# EAGLE board TakpadV3 (EAGLE 8.4.0)
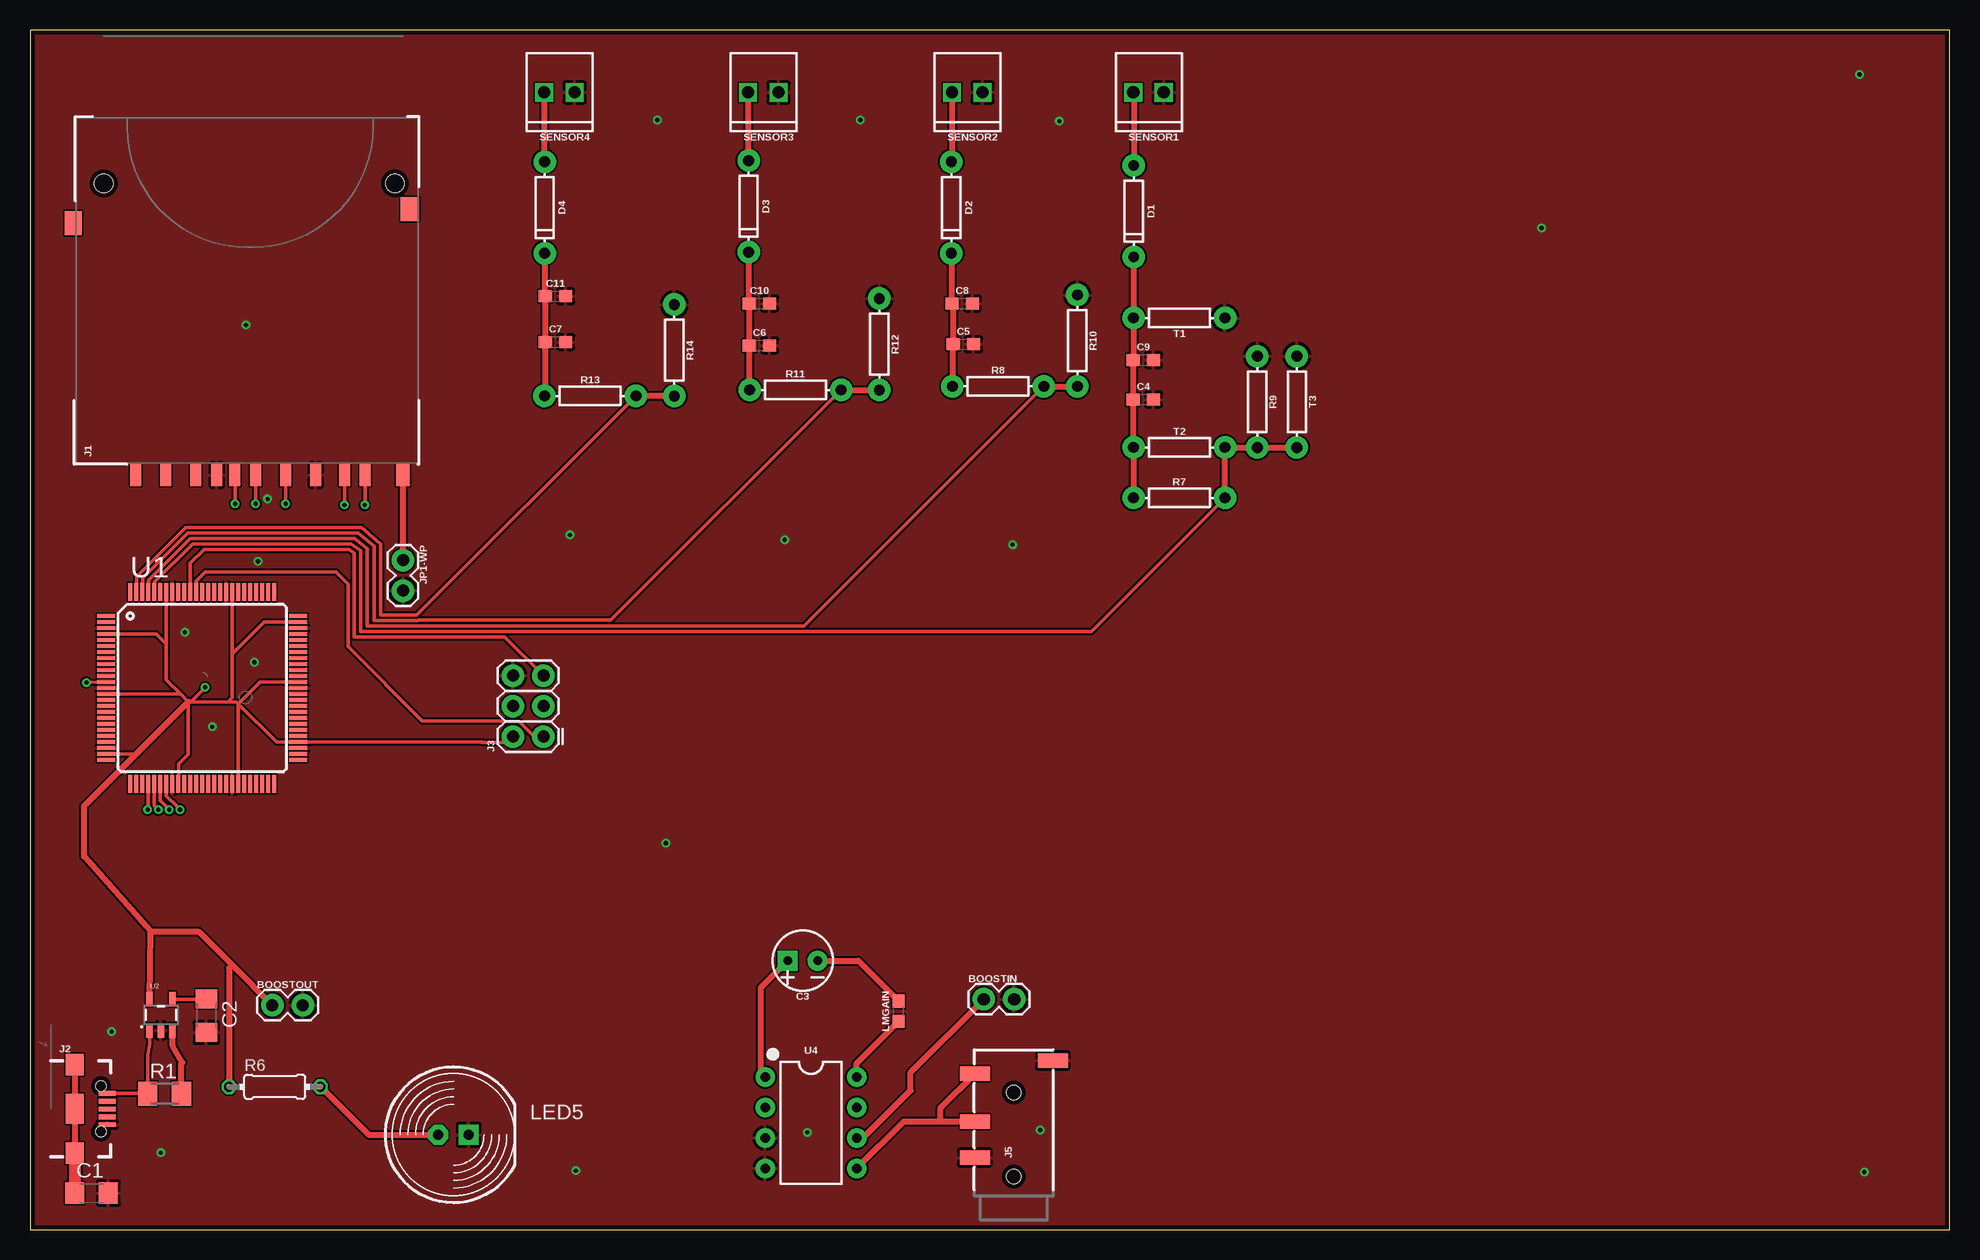
[diagram p0: board, top side]
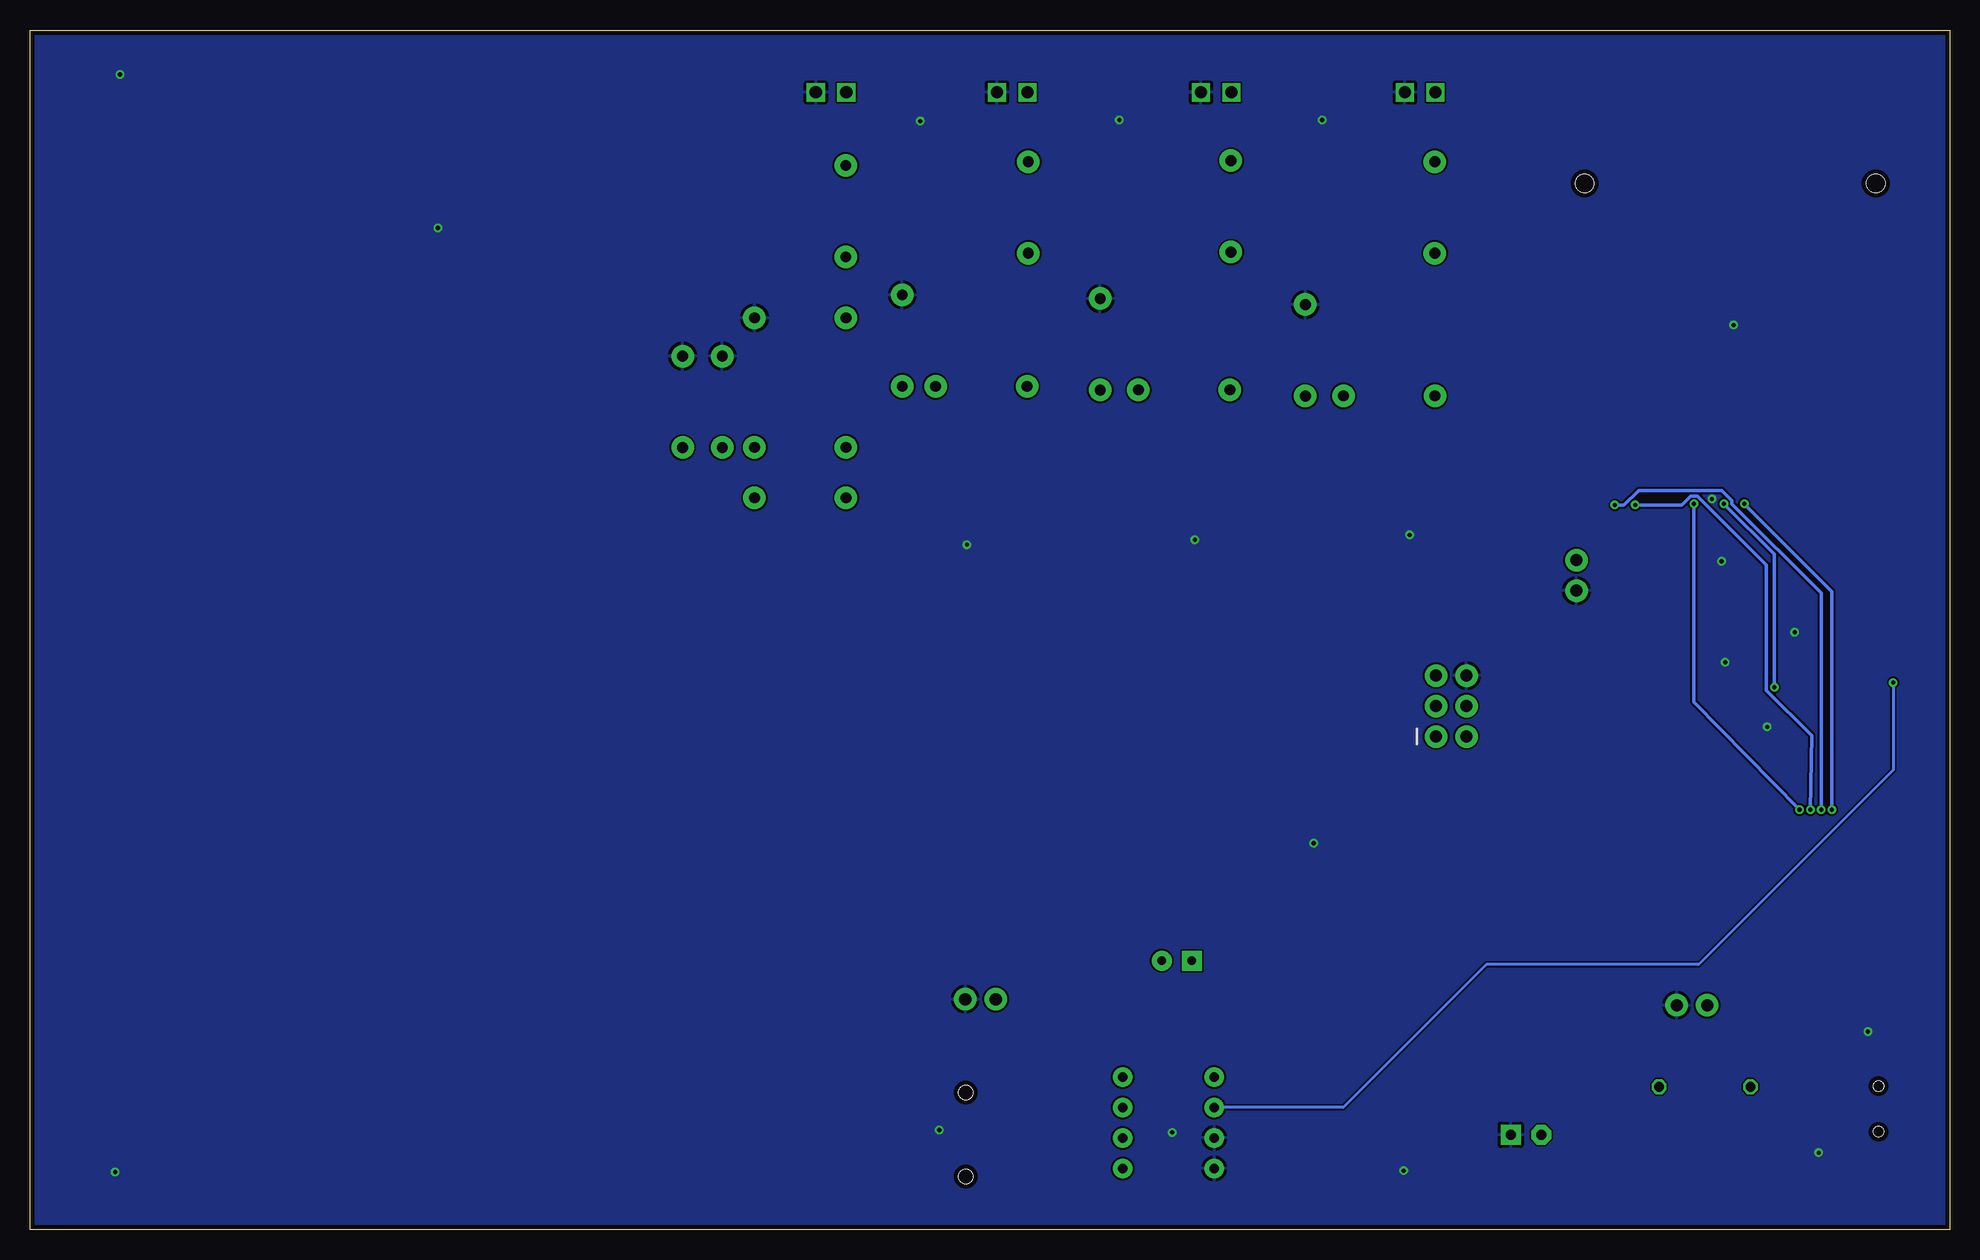
[diagram p1: board, bottom side, seen from below]

Size 160 x 100 mm. Coordinates in mm from the lower left corner, seen from the top.
Outline: 0,0 160,0 160,100 0,100 0,0
Copper layers (1*16): Top 0.0356mm / dielectric 1.5011mm / Bottom 0.0356mm
Design rules "osh-park-2-layers-design-rules": minimum track width 6mil, minimum drill 10mil, track to track 6mil, track to pad 6mil, pad to pad 6mil, via to via 6mil, smd to smd 6mil, copper to edge 15mil, drill to drill 6mil, minimum pad ring 7mil, minimum via ring 7mil, stop-mask expansion 3mil, vias tented up to drill 0mil, thermal gap 10mil

## Footprints (pad centres in the part's own frame; a part is rotated, then mirrored left to right if it is on the bottom)
1X02 = drill 1.016 pad 1.88: 1 0,0; 2 2.54,0
C1206 = smd 1.6 x 1.8: 1 -1.4,0; 2 1.4,0
CPOL-RADIAL-2.5MM-5MM-KIT = drill 0.7 pad 1.651 square: 1 1.25,0 | drill 0.7 pad 1.651: 2 -1.25,0
0603 = smd 1.1 x 1: 1 -0.85,0; 2 0.85,0
DIODE-1N4148 = drill 0.9 pad 1.88: A -3.81,0; C 3.81,0
SD = smd 1.8 x 0.9: 1 -1,6.77; 2 -1,4.27; 3 -1,2.52; 4 -1,-0.73; 5 -1,-3.23; 6 -1,-5.73; 7 -1,-8.15; 8 -1,-9.85; 9 -1,9.27; CD -1,1.02 | smd 2 x 1.4: SH@1 20,14.496 | smd 2 x 1.527: SH@2 21.15,-13.589 | smd 1.8 x 1.1: WP -1,-13 | hole 1.55: 23.3,11.94; 23.3,-12.32
USB-B-MICRO-SMD = smd 1.45 x 0.4: D+ 2.725,0; D- 2.725,0.65; GND 2.725,-1.3; ID 2.725,-0.65; VBUS 2.725,1.3 | smd 1.5 x 1.8: SHIELD1 0,3.685; SHIELD2 0,-3.685 | smd 1.5 x 2.5: SHIELD3 0,0 | hole 0.85: 2.2,1.9; 2.2,-1.9
2X3 = drill 1.016 pad 1.88: 1 0,0; 2 0,2.54; 3 2.54,0; 4 2.54,2.54; 5 5.08,0; 6 5.08,2.54
AUDIO_JACK_3.5MM_TRRS_SMD_RA = smd 1.2 x 2.5: EARTH 11.3,-3.25; RING1 6.2,3.25; RING2 3.2,3.25; TIP 10.2,3.25 | hole 1.2: 1.6,0; 8.6,0
LED10MM = drill 0.813 pad 1.676 octagon: A -1.27,0 | drill 0.813 pad 1.676 square: K 1.27,0
M1206 = smd 1.6 x 2: 1 -1.4,0; 2 1.4,0
0204/7 = drill 0.813 octagon: 1 -3.81,0; 2 3.81,0
AXIAL-0.3 = drill 0.9 pad 1.88: P$1 -3.81,0; P$2 3.81,0
1X02_2.54_SCREWTERM = drill 1.016 square: P1 2.54,0; P2 0,0
TQFP-100A-100 = smd 1.5 x 0.342: 1 -8,6; 2 -8,5.5; 3 -8,5; 4 -8,4.5; 5 -8,4; 6 -8,3.5; 7 -8,3; 8 -8,2.5; 9 -8,2; 10 -8,1.5; 11 -8,1; 12 -8,0.5; 13 -8,0; 14 -8,-0.5; 15 -8,-1; 16 -8,-1.5; 17 -8,-2; 18 -8,-2.5; 19 -8,-3; 20 -8,-3.5; 21 -8,-4; 22 -8,-4.5; 23 -8,-5; 24 -8,-5.5; 25 -8,-6; 51 8,-6; 52 8,-5.5; 53 8,-5; 54 8,-4.5; 55 8,-4; 56 8,-3.5; 57 8,-3; 58 8,-2.5; 59 8,-2; 60 8,-1.5; 61 8,-1; 62 8,-0.5; 63 8,0; 64 8,0.5; 65 8,1; 66 8,1.5; 67 8,2; 68 8,2.5; 69 8,3; 70 8,3.5; 71 8,4; 72 8,4.5; 73 8,5; 74 8,5.5; 75 8,6 | smd 0.342 x 1.5: 26 -6,-8; 27 -5.5,-8; 28 -5,-8; 29 -4.5,-8; 30 -4,-8; 31 -3.5,-8; 32 -3,-8; 33 -2.5,-8; 34 -2,-8; 35 -1.5,-8; 36 -1,-8; 37 -0.5,-8; 38 0,-8; 39 0.5,-8; 40 1,-8; 41 1.5,-8; 42 2,-8; 43 2.5,-8; 44 3,-8; 45 3.5,-8; 46 4,-8; 47 4.5,-8; 48 5,-8; 49 5.5,-8; 50 6,-8; 76 6,8; 77 5.5,8; 78 5,8; 79 4.5,8; 80 4,8; 81 3.5,8; 82 3,8; 83 2.5,8; 84 2,8; 85 1.5,8; 86 1,8; 87 0.5,8; 88 0,8; 89 -0.5,8; 90 -1,8; 91 -1.5,8; 92 -2,8; 93 -2.5,8; 94 -3,8; 95 -3.5,8; 96 -4,8; 97 -4.5,8; 98 -5,8; 99 -5.5,8; 100 -6,8
SOT23-5 = smd 0.55 x 1.2: 1 -0.95,-1.3; 2 0,-1.3; 3 0.95,-1.3; 4 0.95,1.3; 5 -0.95,1.3
DIP08 = drill 0.813 pad 1.626: 1 -3.81,-3.81; 2 -1.27,-3.81; 3 1.27,-3.81; 4 3.81,-3.81; 5 3.81,3.81; 6 1.27,3.81; 7 -1.27,3.81; 8 -3.81,3.81

## Placement (x,y rotation side)
BOOSTIN  [1X02]  79.5,19.2 0 top
BOOSTOUT  [1X02]  20.2,18.7 0 top
C1  100n  [C1206]  5.13,3.04 0 top
C2  470p  [C1206]  14.7,17.83 270 top
C3  10uF  [CPOL-RADIAL-2.5MM-5MM-KIT]  64.4,22.4 180 top
C4  47pF  [0603]  92.8,69.2 0 top
C5  47pF  [0603]  77.8,73.8 0 top
C6  47pF  [0603]  60.8,73.7 0 top
C7  47pF  [0603]  43.8,74 0 top
C8  1uF  [0603]  77.7,77.2 0 top
C9  1uF  [0603]  92.8,72.5 0 top
C10  1uF  [0603]  60.8,77.2 0 top
C11  1uF  [0603]  43.8,77.8 0 top
D1  200mA/100V/1V  [DIODE-1N4148]  92,84.9 270 top
D2  200mA/100V/1V  [DIODE-1N4148]  76.8,85.2 270 top
D3  200mA/100V/1V  [DIODE-1N4148]  59.9,85.3 270 top
D4  200mA/100V/1V  [DIODE-1N4148]  42.9,85.2 270 top
J1  SD_CARD_SOCKET  [SD]  18.09,63.9 90 top
J2  [USB-B-MICRO-SMD]  3.71,10.05 0 top
J3  AVR_SPI_PROG_3X2PTH  [2X3]  42.8,41.1 90 top
J5  AUDIO_JACK_TRRSSMD_RA  [AUDIO_JACK_3.5MM_TRRS_SMD_RA]  82,2.8 90 top
JP1-WP  [1X02]  31.1,55.8 270 top
LED5  [LED10MM]  35.3,7.9 0 top
LMGAIN  1  [0603]  72.4,18.2 90 top
R1  10k  [M1206]  11.22,11.32 0 top
R6  330  [0204/7]  20.4,11.9 0 top
R7  470k  [AXIAL-0.3]  95.8,61 0 top
R8  470k  [AXIAL-0.3]  80.7,70.3 0 top
R9  150k  [AXIAL-0.3]  102.3,69 270 top
R10  150k  [AXIAL-0.3]  87.3,74.1 270 top
R11  470k  [AXIAL-0.3]  63.8,70 0 top
R12  150k  [AXIAL-0.3]  70.8,73.8 270 top
R13  470k  [AXIAL-0.3]  46.7,69.5 0 top
R14  150k  [AXIAL-0.3]  53.7,73.3 270 top
SENSOR1  [1X02_2.54_SCREWTERM]  94.5,94.8 180 top
SENSOR2  [1X02_2.54_SCREWTERM]  79.4,94.8 180 top
SENSOR3  [1X02_2.54_SCREWTERM]  62.4,94.8 180 top
SENSOR4  [1X02_2.54_SCREWTERM]  45.4,94.8 180 top
T1  0  [AXIAL-0.3]  95.8,76 180 top
T2  0  [AXIAL-0.3]  95.8,65.2 0 top
T3  0  [AXIAL-0.3]  105.6,69 270 top
U1  ATXMEGA128A1U-AU  [TQFP-100A-100]  14.37,45.13 0 top
U2  3.3V/150mA  [SOT23-5]  10.91,17.9 0 top
U4  LM386N  [DIP08]  65.1,8.9 270 top

## Library data of the parts
BOOSTIN BOOSTOUT J3 SENSOR1-SENSOR4 = SparkFun-Connectors
C1 C2 R1 R6 = rcl
C3 = SparkFun-Capacitors; PROD_ID: CAP-08440
C4-C11 = SparkFun-Capacitors; PROD_ID: CAP-08913
D1-D4 = SparkFun-DiscreteSemi; PROD_ID: DIO-08378
J1 = SparkFun-Connectors; PROD_ID: CONN-11976; SF_ID: PRT-12769
J2 = SparkFun-Connectors; PROD_ID: CONN-11752
J5 = SparkFun-Connectors; PROD_ID: CONN-10676; SF_ID: PRT-12639; SPICEPREFIX: E
JP1-WP = SparkFun-Retired
LED5 = led
LMGAIN = SparkFun-Resistors; PROD_ID: RES-08269
R7-R14 T1-T3 = SparkFun-Resistors; PROD_ID: RES-12182
U1 = atmel-xmega
U2 = SparkFun-IC-Power; PROD_ID: VREG-00822
U4 = SparkFun-IC-Amplifiers; PROD_ID: IC-10899

## Nets
AUDIOINPUT: U1.12 U4.2
AUDIOOUT: J5.RING1 J5.TIP U4.5
BP: C2.1 U2.4
CD: J1.CD U1.29
CLK: J1.5 U1.32
DAT0: J1.7 U1.31
DAT1: J1.8 U1.30
EN: R1.2 U2.3
GND: BOOSTIN.2 BOOSTOUT.2 C1.2 C2.2 C4.2 C5.2 C6.2 C7.2 C8.2 C9.2 C10.2 C11.2 J1.3 J1.6 J2.GND J3.6 J5.EARTH J5.RING2 JP1-WP.2 LED5.K R9.P$1 R10.P$1 R12.P$1 R14.P$1 SENSOR1.P2 SENSOR2.P2 SENSOR3.P2 SENSOR4.P2 T1.P$1 T3.P$1 U1.3 U1.13 U1.23 U1.33 U1.43 U1.53 U1.63 U1.73 U1.84 U1.93 U2.2 U4.3 U4.4
LED: LED5.A R6.2
MISO: J3.1 U1.89
N$9: C3.1 U4.1
N$10: C3.2 LMGAIN.2
N$11: LMGAIN.1 U4.8
RST: J3.5 U1.90
SENSOR1: D1.A SENSOR1.P1
SENSOR1IN: C4.1 C9.1 D1.C R7.P$1 T1.P$2 T2.P$1
SENSOR1OUT: R7.P$2 R9.P$2 T2.P$2 T3.P$2 U1.96
SENSOR2: D2.A SENSOR2.P1
SENSOR2IN: C5.1 C8.1 D2.C R8.P$1
SENSOR2OUT: R8.P$2 R10.P$2 U1.97
SENSOR3: D3.A SENSOR3.P1
SENSOR3IN: C6.1 C10.1 D3.C R11.P$1
SENSOR3OUT: R11.P$2 R12.P$2 U1.98
SENSOR4: D4.A SENSOR4.P1
SENSOR4IN: C7.1 C11.1 D4.C R13.P$1
SENSOROUT4: R13.P$2 R14.P$2 U1.99
SHIELD: C1.1 J2.SHIELD1 J2.SHIELD2 J2.SHIELD3
UPCONVERTERINPUT: BOOSTIN.1 U4.6
V+: BOOSTOUT.1 J1.4 J3.2 R6.1 U1.4 U1.14 U1.24 U1.34 U1.44 U1.54 U1.64 U1.74 U1.83 U1.94 U2.5
VIN: J2.VBUS R1.1 U2.1
WP: J1.WP JP1-WP.1

## Tracks (layer width: path | path; a pad name or v marks a point on that pad's centre or on a via)
AUDIOINPUT  (via drill 0.35)
  Top 0.254: U1.12 6.34,45.6 v4.7,45.6
  Bottom 0.254: v4.7,45.6 4.7,38.3 20.9,22.1 38.6,22.1 50.53,10.17 U4.2
AUDIOOUT
  Top 0.508: J5.RING1 76.3,9 | 76.3,9 75.9,9 75.9,10.15 J5.TIP | 76.3,9 72.82,9 U4.5
BP
  Top 0.305: C2.1 14.67,19.2 U2.4
CD  (via drill 0.35)
  Top 0.305: J1.CD 17.1,62.87 v17.1,60.5 | v9.8,35 9.87,35.07 U1.29
  Bottom 0.305: v17.1,60.5 9.8,53.2 v9.8,35
CLK  (via drill 0.35)
  Top 0.305: J1.5 21.32,60.52 v21.3,60.5 | v12.5,35 12.26,35.24 12.26,35.27 11.37,36.16 U1.32
  Bottom 0.305: v21.3,60.5 21.3,44 v12.5,35
DAT0  (via drill 0.35)
  Top 0.305: J1.7 26.24,60.44 v26.2,60.4 | v11.6,35 11.36,35.24 11.36,35.27 10.87,35.76 U1.31
  Bottom 0.305: v26.2,60.4 22.33,60.4 21.57,61.16 21.03,61.16 15.26,55.39 15.26,44.93 11.5,41.17 v11.6,35
DAT1  (via drill 0.35)
  Top 0.305: J1.8 27.94,60.44 v27.9,60.4 | v10.7,35 10.46,35.24 10.46,35.27 10.37,35.36 U1.30
  Bottom 0.305: v10.7,35 10.7,53.05 18.14,60.49 18.14,60.77 18.98,61.62 25.91,61.62 27.13,60.4 v27.9,60.4
EN
  Top 0.508: R1.2 12.62,13.82 12.7,13.9 11.9,15.26 U2.3
GND  (via drill 0.35)
  other vias: 12.9,49.8 18.7,47.3 15.2,41.9 19.8,60.9 53,32.2 45.5,4.9 126,83.5 19,55.7 81.9,57.1 62.9,57.5 45,57.9 18,75.4 152.9,4.8 152.5,96.3 64.8,8.1 84.2,8.3 10.9,6.4 6.8,16.5 52.3,92.5 69.2,92.5 85.8,92.4
  pour Top: -3.4,108.3 -15.4,96.3 -15.4,-14.5 -12.6,-11.7 174.1,-11.7 170.9,-8.5 170.9,116.4 162.8,108.3
  pour Bottom: -5.2,104.9 -5.2,-6.7 -4.3,-5.8 166.9,-5.8 168.4,-4.3 168.4,103.4 -3.7,103.4
LED
  Top 0.508: R6.2 28.21,7.9 LED5.A
MISO
  Top 0.305: U1.89 13.87,54.07 14.6,54.8 25.5,54.8 26.5,53.8 26.5,48.6 32.7,42.4 39.3,42.4 39.35,42.34 40.78,42.34 42.02,41.1 J3.1
N$9
  Top 0.508: C3.1 60.9,20.15 60.9,13.1 U4.1
N$10
  Top 0.508: C3.2 69.05,22.4 LMGAIN.2
N$11
  Top 0.508: U4.8 68.91,13.86 LMGAIN.1
RST
  Top 0.305: J3.5 39.58,49.4 27,49.4 27,56.4 26.6,56.7 14.5,56.7 13.37,55.57 U1.90
SENSOR1
  Top 0.508: SENSOR1.P1 92,94.76 D1.A
SENSOR1IN
  Top 0.508: D1.C T1.P$2 91.99,72.54 C9.1 C4.1 91.95,65.24 T2.P$1 R7.P$1
SENSOR1OUT
  Top 0.305: U1.96 10.39,53.15 10.39,54.01 13.54,57.16 26.79,57.16 27.56,56.59 27.56,49.86 88.47,49.86 R7.P$2
  Top 0.508: R7.P$2 T2.P$2 R9.P$2 T3.P$2
SENSOR2
  Top 0.508: SENSOR2.P1 76.86,89.07 D2.A
SENSOR2IN
  Top 0.508: D2.C 76.8,77.25 C8.1 76.95,77.1 C5.1 76.89,73.74 R8.P$1
SENSOR2OUT
  Top 0.305: U1.97 9.89,53.15 9.89,54.15 13.36,57.61 27.08,57.61 28.11,56.78 28.11,50.31 64.52,50.31 R8.P$2
  Top 0.508: R8.P$2 R10.P$2
SENSOR3
  Top 0.508: SENSOR3.P1 59.86,89.15 D3.A
SENSOR3IN
  Top 0.508: D3.C 59.9,77.25 C10.1 C6.1 59.95,70.04 R11.P$1
SENSOR3OUT
  Top 0.305: U1.98 9.39,53.15 9.39,54.3 13.17,58.07 27.37,58.07 28.67,56.97 28.67,50.77 32.37,50.77 32.4,50.8 48.41,50.8 R11.P$2
  Top 0.508: R11.P$2 R12.P$2
SENSOR4
  Top 0.508: SENSOR4.P1 42.86,89.05 D4.A
SENSOR4IN
  Top 0.508: D4.C 42.9,77.85 C11.1 C7.1 42.95,69.56 R13.P$1
SENSOROUT4
  Top 0.305: U1.99 8.89,53.15 8.89,54.45 12.98,58.53 27.66,58.53 29.23,57.16 29.23,51.23 32.24,51.23 R13.P$2
  Top 0.508: R14.P$2 R13.P$2
SHIELD
  Top 0.508: J2.SHIELD1 J2.SHIELD3 J2.SHIELD2 3.73,6.34
  Top 1.016: C1.1 3.73,6.34 J2.SHIELD2
UPCONVERTERINPUT
  Top 0.508: U4.6 69.43,7.63 73.4,11.6 73.4,13.1 BOOSTIN.1
V+  (via drill 0.35)
  Top 0.305: 13.2,44 13.2,39.6 12.4,38.8 12.4,38.01 12.39,38.01 12.39,37.15 U1.34 | 13.2,44 16.5,44 | 16.5,44 17.2,44 17.37,43.83 | U1.44 17.37,43.83 | 17.37,43.83 19.17,45.63 U1.64 | 17.37,43.83 20.57,40.63 U1.54 37.67,40.63 37.7,40.6 39.76,40.6 J3.2 | 13.2,44 12.57,44.63 | 12.57,44.63 U1.14 | 12.57,44.63 11.37,45.83 11.37,48.8 | 11.37,48.8 U1.94 | 11.37,48.8 10.54,49.63 U1.4 | 16.5,44 16.87,44.37 16.87,48 | 16.87,48 U1.83 | 16.87,48 19.5,50.63 U1.74 | U1.24 8.83,39.63 9.05,39.85 | J1.4 18.82,60.52 v18.8,60.5 | 13.2,44 13.4,44 v14.6,45.2
  Top 0.508: U2.5 10.06,24.84 | 10.06,24.84 4.5,31.1 4.5,35.3 9.05,39.85 13.2,44 | 10.06,24.84 14.06,24.84 16.85,22.05 | 16.85,22.05 BOOSTOUT.1 | 16.85,22.05 16.59,21.79 R6.1
  Bottom 0.305: v14.6,45.2 14.6,56.3 v18.8,60.5
VIN
  Top 0.305: 6.46,11.32 J2.VBUS 9.79,11.35 9.8,11.34 | 9.8,11.34 R1.1 | 9.8,11.34 9.8,14.5 9.96,15.46 U2.1
WP
  Top 0.508: JP1-WP.1 J1.WP